# Altium PCB fullflex-1.1-addedsomevias.PcbDoc
Units mil, origin at the board's own origin, x right, y up, seen from the top; angles counter-clockwise.
Board outline 1000.01 x 1200 mil, 4 copper layers (metal4 (pad), metal3 (RF antennae), metal2 (power/ground), metal1 (signal)), stack 13.386 mil thick; 55 components, 23 nets, 173 pads, 174 vias.
Unrouted connection lines stored in the file: 37.
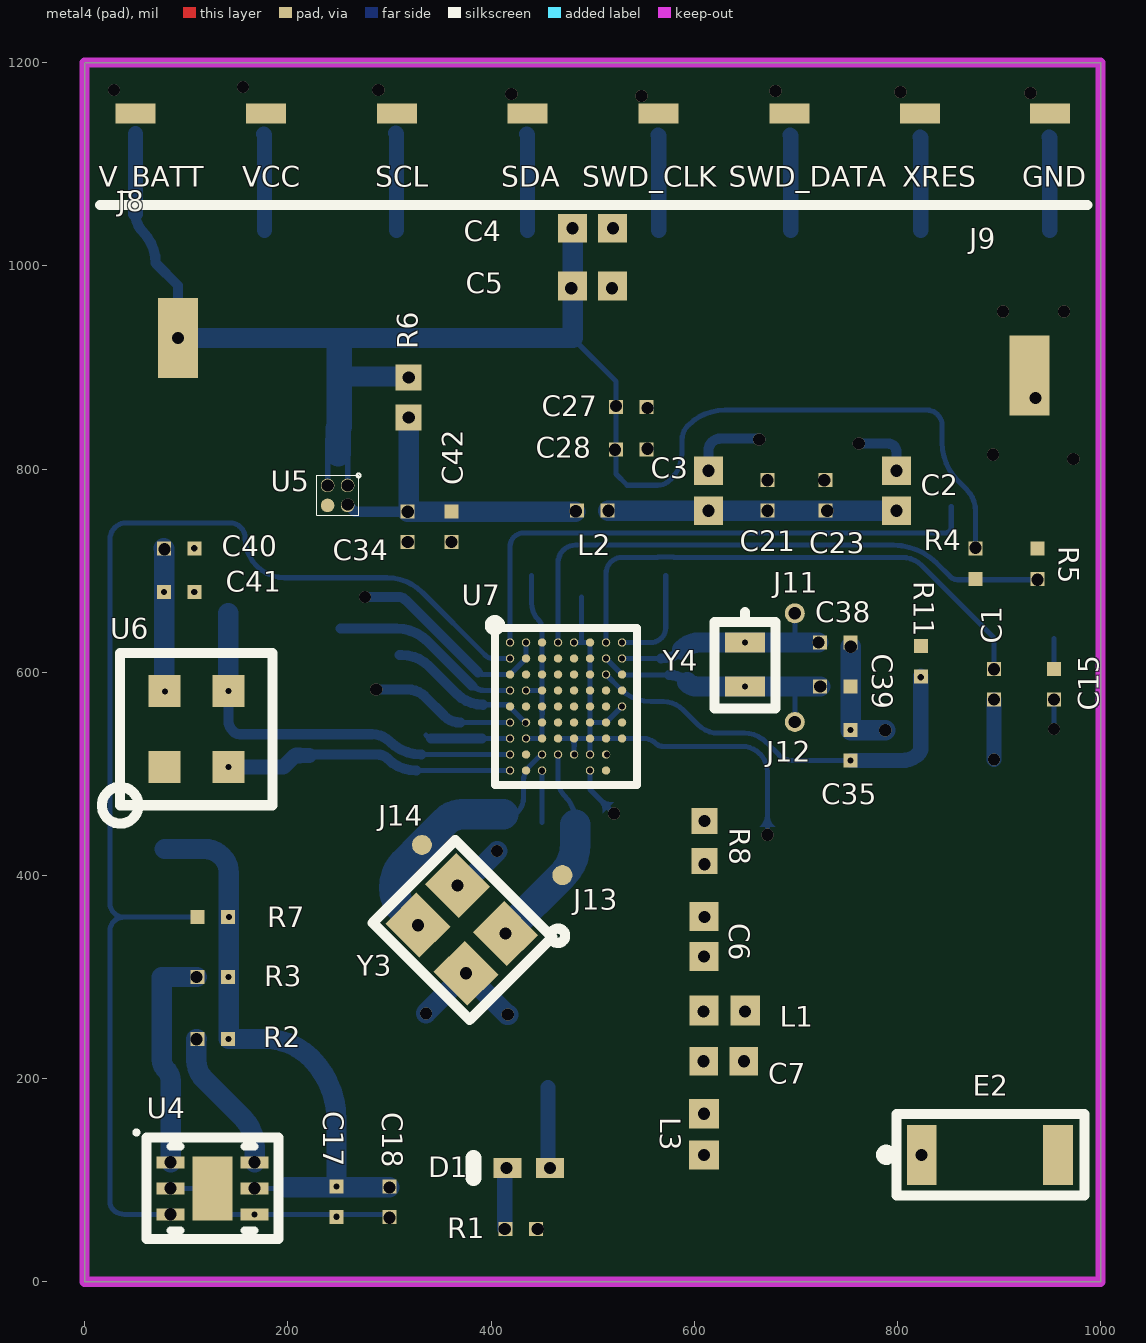
[diagram p0: metal4 (pad) view]
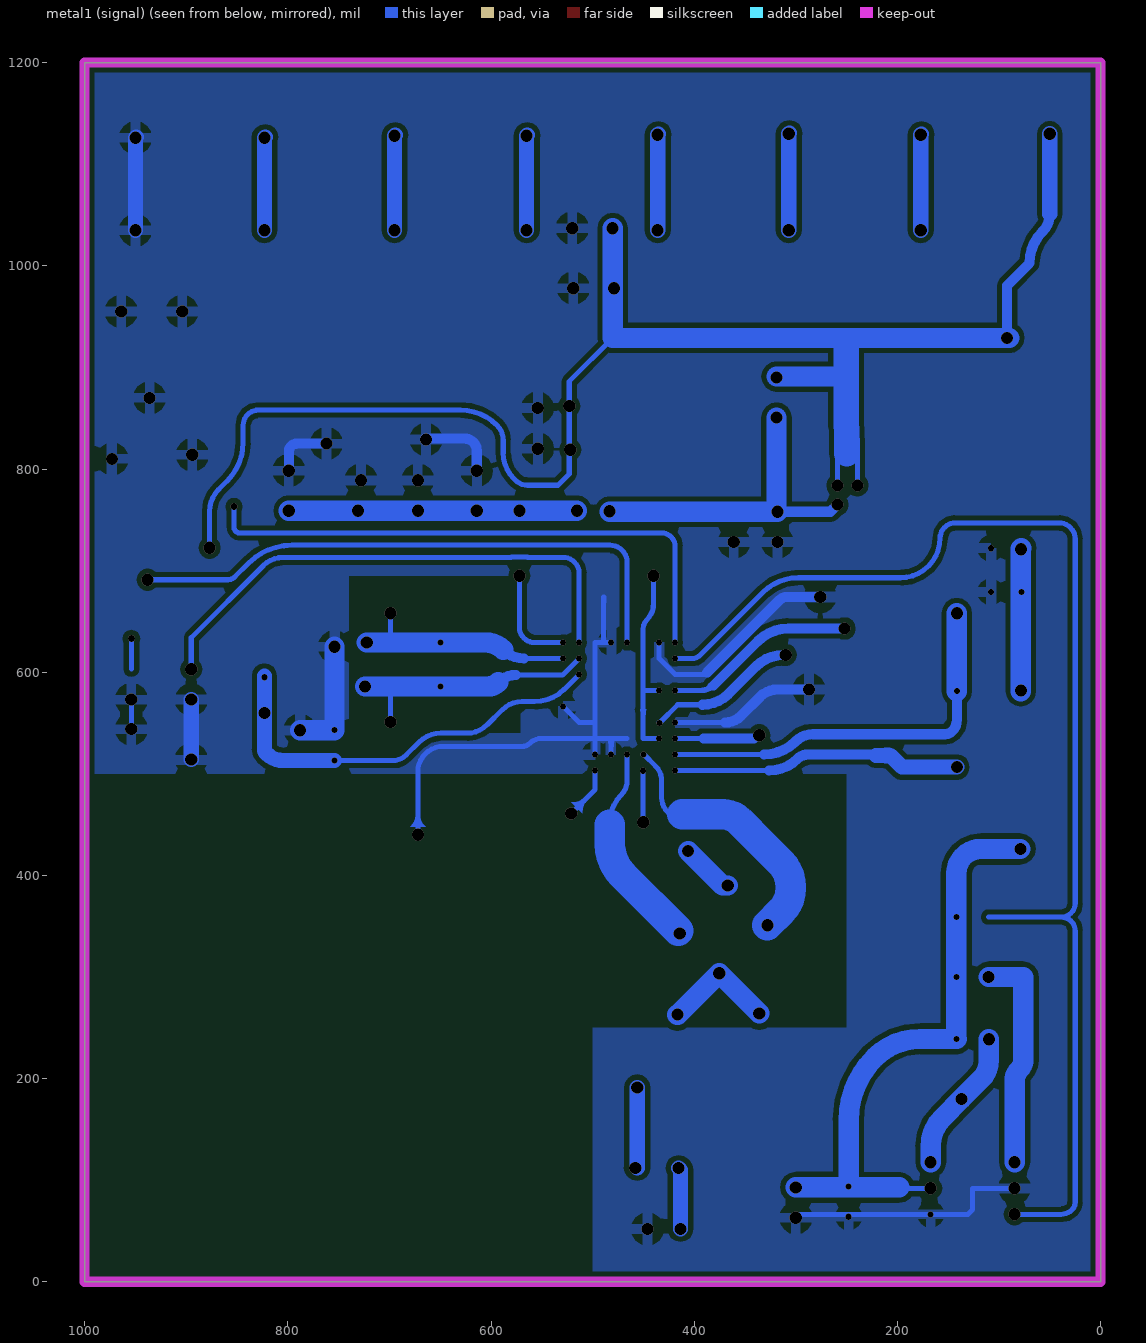
[diagram p1: metal1 (signal) view, seen from below]
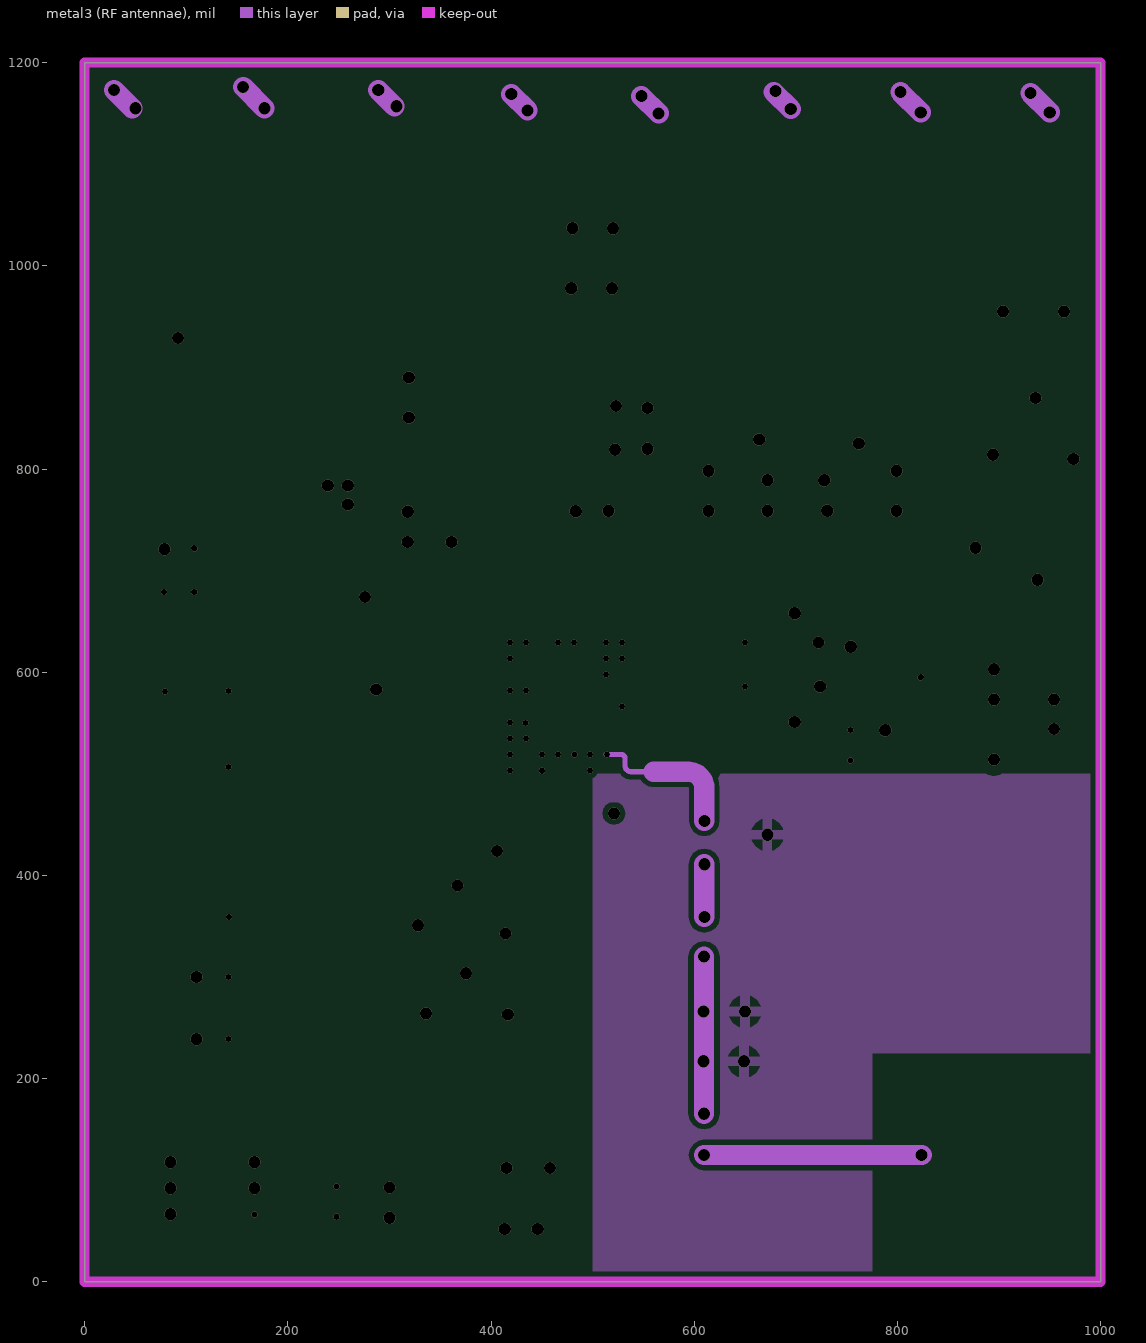
[diagram p2: metal3 (RF antennae)]
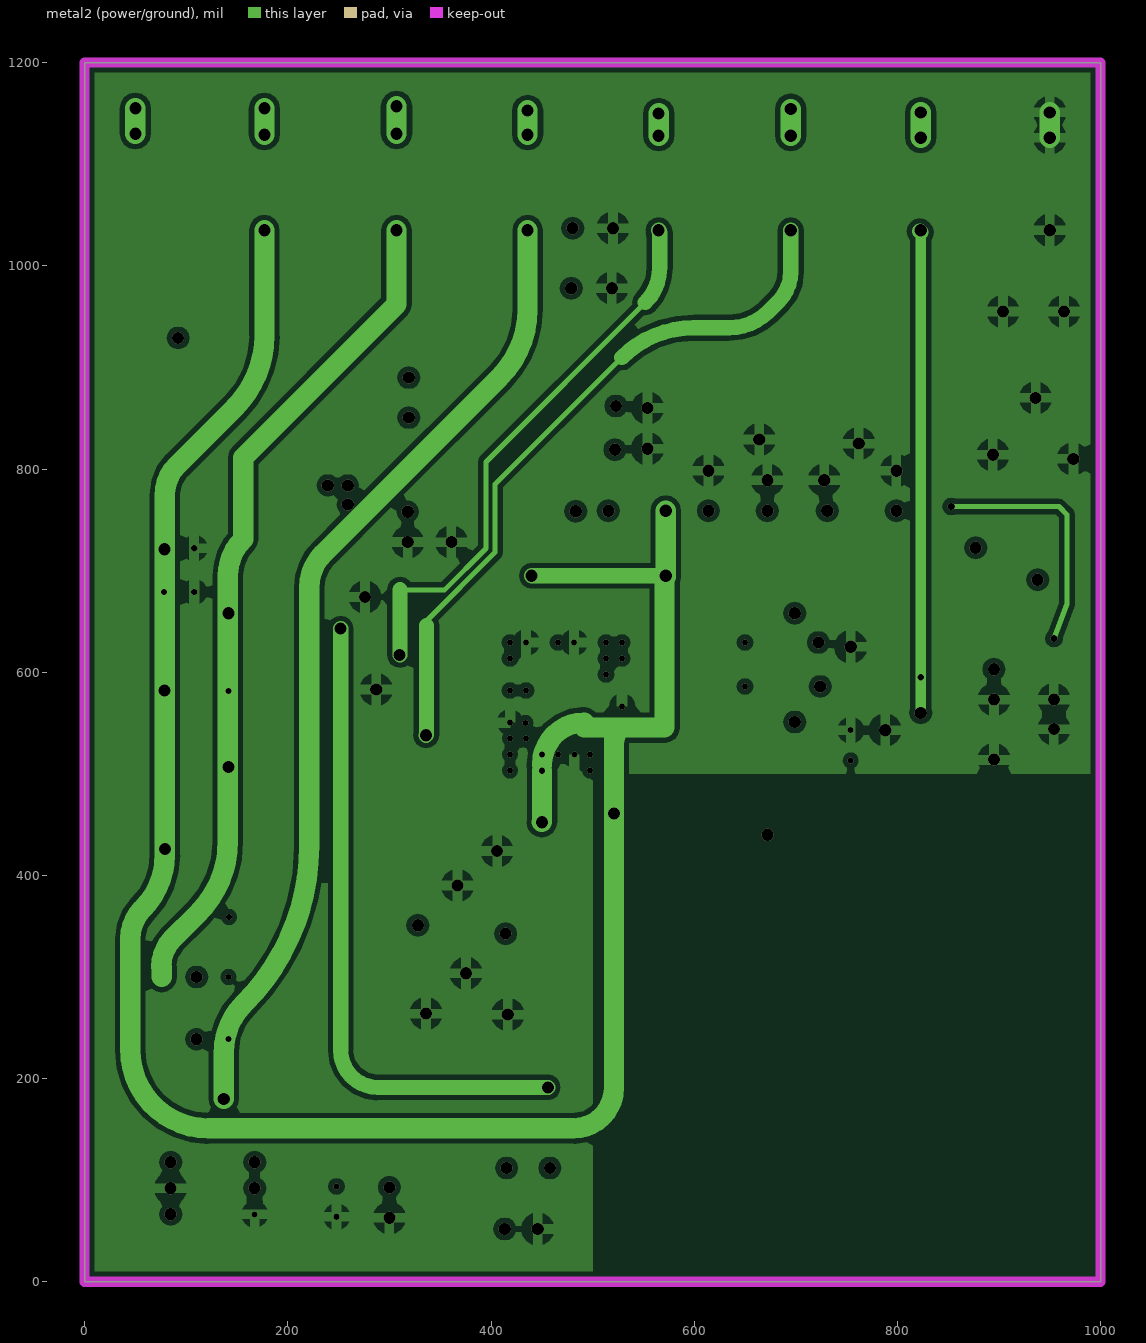
[diagram p3: metal2 (power/ground)]

## Layer stack, top to bottom
Polyimide-1: solder mask 0.4, Solder Resist, Dk 3.5
metal4 (pad): signal copper 0.04
Polyimide-2: prepreg 5, Polyimide, Dk 4.2
metal3 (RF antennae): signal copper 1.417
Polyimide-3: dielectric 0.472, Dk 3.4
metal2 (power/ground): signal copper 1.417
Polyimide-4: prepreg 5, Dk 4.2
metal1 (signal): signal copper 0.04

## Board outline
0,0 1000.01,0 999.92,1200 0,1200

## Design rules (kind name [scope] priority, off if disabled: settings)
Clearance "pour clearance" [(InNet('GND'))] p1: gap=5 ignorepadtopadclearanceinfootprint=FALSE
Clearance [All] p2: gap=4 ignorepadtopadclearanceinfootprint=TRUE
ComponentClearance [All] p1: gap=15.75 collisioncheckmode=3 verticalgap=10 showdistances=FALSE
DiffPairsRouting [All] p1: maxlimit=10 minlimit=5 mostfreqgap=10 toplayer_minwidth=5 toplayer_maxwidth=35 toplayer_prefwidth=7.5 midlayer1_minwidth=5 midlayer1_maxwidth=15 midlayer1_prefwidth=7.5 midlayer2_minwidth=5 midlayer2_maxwidth=15 midlayer2_prefwidth=7.5 bottomlayer_minwidth=5 bottomlayer_maxwidth=35 bottomlayer_prefwidth=7.5 maxuncoupledlength=500
FabricationTestPointUsage TestPointUsage [All] p1: valid=0 allowmultiple=FALSE
FabricationTestpoint Testpoint [All] p1: side=3 testpointundercomponent=TRUE minsize=40 maxsize=100 preferedsize=60 minholesize=0 maxholesize=40 preferedholesize=32 testpointgrid=1 allowsidetop=TRUE allowsidebottom=TRUE usegrid=TRUE gridtolerance=0.01
HoleToHoleClearance [All] p1: gap=1 allowstackedmicrovias=TRUE
MinimumAnnularRing [All] p1: minimumring=0
MinimumSolderMaskSliver [All] p1: minsoldermaskwidth=1
PolygonConnect [All] p1: connectstyle=Relief reliefconductorwidth=10 reliefentries=4 polygonreliefangle="90 Angle" airgapwidth=10
RoutingCorners [All] p1: cornerstyle=45-Degree minsetback=5 maxsetback=30
RoutingVias [All] p1: holewidth=12 width=22 viastyle="Through Hole" minholewidth=6 minwidth=12 maxholewidth=28 maxwidth=25 viatemplateguid#1={CE6DF762-5975-4FEC-9C67-CC1ADE7D6B15} viatemplatename#1=v15h15(1)
ShortCircuit [All] p1: allowed=TRUE
SilkToSilkClearance [All] p1: silktosilkclearance=1
SolderMaskExpansion [All] p1: expansion=-3
ViasUnderSMD [All] p1: allowed=TRUE
Width [All] p1: maxlimit=100 minlimit=5 preferedwidth=5
21 further rules are at their usual default settings.

## Classes and differential pairs
differential pair XTAL_LF: +XTAL_LF_P -XTAL_LF_N
differential pair XTAL_HF: +XTAL_HF_P -XTAL_HF_N

## Components (designator, comment, footprint, x,y, rotation, side; value= is the part's Value field where it differs from the comment)
C1 "1uF" CAP_0201(0603)_M 895.01,588 r270 top
C2 "10uF" CAP_0402(1005)_M 799,778.68 r90 top
C3 "10uF" CAP_0402(1005)_M 614,778.68 r90 top
C4 "10uF" CAP_0402(1005)_M 500,1037 r0 top
C5 "10uF" CAP_0402(1005)_M 500,980 r0 top
C6 "=Capacitance" CAP_0402(1005)_M 609.65,339.77 r270 top
C7 "=Capacitance" CAP_0402(1005)_M 629,217 r0 top
C15 "1uF" CAP_0201(0603)_M 954.01,588 r270 top
C17 "100nF" CAP_0201(0603)_M 248,79 r270 top
C18 "1uF" CAP_0201(0603)_M 300,79 r270 top
C21 "1uF" CAP_0201(0603)_M 672,773.96 r90 top
C23 "1uF" CAP_0201(0603)_M 729,773.96 r90 top
C27 "1uF" CAP_0201(0603)_M 537.96,861 r0 top
C28 "1uF" CAP_0201(0603)_M 537.96,819 r0 top
C34 "100nF" CAP_0201(0603)_M 318,743.04 r270 top
C35 "100pF" CAP_0201(0603)_M 754,528 r90 top
C38 "56pF" CAP_0201(0603)_M 739.04,629 r0 top
C39 "27pF" CAP_0201(0603)_M 739.04,586 r0 top
C40 "1uF" CAP_0201(0603)_M 93,722 r180 top
C41 "100nF" CAP_0201(0603)_M 93,679 r180 top
C42 "1uF" CAP_0201(0603)_M 361,743.04 r270 top
D1 "Red" LED_0402(1005) 438,112 r180 top
E2 "2450AT18B100" 2450AT18B100 824,125 r0 top
GND "Probe-Pin Pad" POGO-PIN-PAD 950,1150 r90 top
J8 "Battery_Connector" BATTERY_PAD 92,929 r0 top
J9 "Battery_Connector" BATTERY_PAD 930,892 r0 top
J11 "Probe-CLOCK" POGO-CLOCK-PAD 699,658 r90 top
J12 "Probe-CLOCK" POGO-CLOCK-PAD 699,551 r90 top
J13 "Probe-CLOCK" POGO-CLOCK-PAD 470.27,400.27 r90 top
J14 "Probe-CLOCK" POGO-CLOCK-PAD 332,430 r270 top
L1 "=Inductance" IND_0402(1005)_M 630,267 r180 top
L2 "Inductor Iron" RES_0201(0603)_M 499.75,759 r0 top
L3 "=Inductance" IND_0402(1005)_M 609.65,145.08 r270 top
R1 "270R" RES_0201(0603)_M 429.25,52 r0 top
R2 "4.7kR" RES_0201(0603)_M 126,239 r180 top
R3 "4.7kR" RES_0201(0603)_M 126,300 r180 top
R4 "100kR" RES_0201(0603)_M 877,706.75 r270 top
R5 "30kR" RES_0201(0603)_M 938,706.75 r90 top
R6 "=Resistance" RES_0402(1005)_M 319,870.32 r270 top
R7 "4.7kR" RES_0201(0603)_M 126.25,359 r0 top
R8 "=Resistance" RES_0402(1005)_M 610,434 r270 top
R11 "4.7kR" RES_0201(0603)_M 823,610.75 r270 top
SCL "Probe-Pin Pad" POGO-PIN-PAD 307.43,1150 r90 top
SDA "Probe-Pin Pad" POGO-PIN-PAD 436.14,1150 r90 top
SWD_CLK "Probe-Pin Pad" POGO-PIN-PAD 564.86,1150 r90 top
SWD_DATA "Probe-Pin Pad" POGO-PIN-PAD 693.57,1150 r90 top
U4 "TMP116" WSON-6 126,92 r0 top
U5 "ADP172" ADP172 249,774 r270 top
U6 "GUVB-C31SM" GUVB-C31SM 110,544 r180 top
U7 "CY8C4127FNI-BL483" WLCSP-68 473.87,566.25 r0 top
V_BATT "Probe-Pin Pad" POGO-PIN-PAD 50,1150 r90 top
VCC "Probe-Pin Pad" POGO-PIN-PAD 178.71,1150 r90 top
XRES "Probe-Pin Pad" POGO-PIN-PAD 822.29,1150 r90 top
Y3 "ECX-2236" ECX-2236 414.33,342.67 r135 top
Y4 "32.768KHz" ABS05 649.87,629.25 r270 top

## Footprints (in the part's own frame and the unit in brackets; to place one, negate y for a bottom-side part, rotate by r counter-clockwise, add the part's x,y. Pads: shape width x height; smd on the part's side, far side on the other; paste and mask are expansions set on the pad)
2450AT18B100 [mm] "2.4GHz Mini Antenna SMD, 50 ohm Resistence"
  rect 0.74x1.5 smd mask+0.03: 1(0,0) 2(3.406,0)
  silkscreen extent -1.02,-1.02 4.06,1.02, body extent -0.05,-0.9 3.35,0.9, height 1.4
ABS05 [mm] "32.768 kHz CRYSTAL 12.5 PF +/-20ppm"
  rect 0.5x1 smd mask+0.1: 1(0,0) 2(1.102,0)
  silkscreen extent -0.76,-0.76 1.65,0.76, body extent -0.25,-0.5 1.35,0.5, height 0.5
ADP172 [mm] "4-Ball WLCSP, CB-4-4"
  round 0.34 smd paste+0.01 mask+0.01: A1(-0.25,0.25) A2(0.25,0.25) B1(-0.25,-0.25) B2(0.25,-0.25)
  silkscreen extent -0.55,-0.53 0.5,0.58, body extent -0.48,-0.48 0.48,0.48, height 0.69
BATTERY_PAD [mm]
  rect 1x2 smd: 1(0,0)
CAP_0201(0603)_M [mm] "Chip Capacitor, Body 0.6x0.3mm, Height 0.33mm, IPC Low Density"
  rect 0.35x0.35 smd mask+0: 1(-0.381,0) 2(0.381,0)
  body extent -0.31,-0.17 0.32,0.16, height 0.33
CAP_0402(1005)_M [mm] "Chip Capacitor, Body 1.0x0.5mm, Height 0.6mm, IPC Low Density"
  rect 0.72x0.72 smd: 1(-0.5,0) 2(0.5,0)
  body extent -0.55,-0.3 0.55,0.3, height 0.6
ECX-2236 [mm] "48 MHz CRYSTAL 2.5X2.0mm"
  rect 1.2x1.1 smd mask+0.05: 1(0,0) 2(1.7,0) 4(0,1.4)
  rect 1.2x1.1 smd paste+0 mask+0.05: 3(1.7,1.4)
  silkscreen extent -1.14,-1.07 2.54,2.16, body extent -0.36,-0.24 2.14,1.76, height 0.8
GUVB-C31SM [mm]
  rect 0.8x0.8 smd: 1(0.8,0.95) 2(-0.8,0.95) 3(-0.8,-0.95) 4(0.8,-0.95)
  silkscreen extent -1.91,-1.91 2.36,2.36, body extent -1,-1.15 1,1.15, height 1.4
IND_0402(1005)_M [mm] "Chip Inductor, 2-Leads, Body 1.1x0.6mm, IPC Low Density"
  rect 0.73x0.74 smd: 1(-0.515,0) 2(0.515,0)
  body extent -0.55,-0.3 0.55,0.3, height 0.45
LED_0402(1005) [mm] "SMD, 2-Leads, Body 1x0.5mm"
  rect 0.7x0.5 smd: A(-0.508,0) K(0.55,0)
  silkscreen extent 1.4,-0.25 1.4,0.25, body extent -0.5,-0.25 0.5,0.25, height 0.6
POGO-CLOCK-PAD [mm]
  round 0.5 smd: 1(0,0)
POGO-PIN-PAD [mm]
  rect 0.5x1 smd: 1(0,0)
  body extent -0.16,-0.31 0.17,0.32, height 0.33
RES_0201(0603)_M [mm] "Chip Resistor, Body 0.6x0.3mm, IPC Low Density"
  rect 0.35x0.35 smd mask-0.05: 1(-0.381,0)
  rect 0.35x0.35 smd mask-0.5: 2(0.381,0)
  body extent -0.31,-0.16 0.31,0.16, height 0.3
RES_0402(1005)_M [mm] "Chip Resistor, 2-Leads, Body 1.05x0.55mm, IPC Low Density"
  rect 0.65x0.65 smd: 1(-0.5,0) 2(0.5,0)
  body extent -0.53,-0.28 0.53,0.28, height 0.4
WLCSP-68 [mm] "PSOC 4 BLE CY8C4247FNI-BL483 N40P8X9_352X391X55"
  round 0.21 smd mask+0: A1(-1.4,1.6) A2(-1,1.6) A3(-0.6,1.6) A4(-0.2,1.6) A5(0.2,1.6) A6(0.6,1.6) A7(1,1.6) A8(1.4,1.6) B1(-1.4,1.2) B2(-1,1.2) B3(-0.6,1.2) B4(-0.2,1.2) B5(0.2,1.2) B6(0.6,1.2) B7(1,1.2) B8(1.4,1.2) C1(-1.4,0.8) C2(-1,0.8) C3(-0.6,0.8) C5(0.2,0.8) C6(0.6,0.8) C7(1,0.8) C8(1.4,0.8) D1(-1.4,0.4) D2(-1,0.4) D3(-0.6,0.4) D4(-0.2,0.4) D5(0.2,0.4) D6(0.6,0.4) D7(1,0.4) D8(1.4,0.4) E1(-1.4,0) E2(-1,0) E3(-0.6,0) E4(-0.2,0) E5(0.2,0) E6(0.6,0) E7(1,0) E8(1.4,0) F1(-1.4,-0.4) F2(-1,-0.4) F3(-0.6,-0.4) F4(-0.2,-0.4) F5(0.2,-0.4) F6(0.6,-0.4) F7(1,-0.4) F8(1.4,-0.4) G1(-1.4,-0.8) G2(-1,-0.8) G3(-0.6,-0.8) G4(-0.2,-0.8) G5(0.2,-0.8) G6(0.6,-0.8) G7(1,-0.8) G8(1.4,-0.8) H1(-1.4,-1.2) H2(-1,-1.2) H3(-0.6,-1.2) H4(-0.2,-1.2) H5(0.2,-1.2) H6(0.6,-1.2) H7(1,-1.2) J1(-1.4,-1.6) J2(-1,-1.6) J3(-0.6,-1.6) J6(0.6,-1.6) J7(1,-1.6)
  round 0.21 smd mask-0.05: C4(-0.2,0.8)
  silkscreen extent -1.9,-1.97 1.77,2.16, body extent -1.77,-1.97 1.77,1.97, height 0.55
WSON-6 [mm] "SON, 6-Leads, Body 2x2mm, Pitch 0.65mm, Thermal Pad 1X1.6mm"
  rect 0.7x0.3 smd: 1(-1.05,0.65) 2(-1.05,0) 3(-1.05,-0.65) 4(1.05,-0.65) 5(1.05,0) 6(1.05,0.65)
  rect 1x1.6 smd: 7(0,0)
  silkscreen extent -1.95,-1.27 1.65,1.45, body extent -1,-1 1,1, height 0.8

## Part data
C1 C15 C18 C21 C23 C27 C28 C40 C42: library part C-0201(0603), "___ OHM ___ mW 0201(0603) SMD", Case/Package=0201, Case Code (Metric)=0603, Dielectric=X6S, Manufacturer=Murata, Manufacturer Part Number=GRM033C81A105ME05D, Max Operating Temperature=105°C, Min Operating Temperature=-55°C, Supplier Part Number 1=490-13219-1-ND, Tolerance=20%, Voltage Rating=10V, Capacitance=1uF, Case Code (Imperial)=0201, ComponentLink1Description=http://search.murata.co.jp/Ceramy/image/img/A01X/partnumbering_e_01.pdf, ComponentLink1URL=http://search.murata.co.jp/Ceramy/image/img/A01X/partnumbering_e_01.pdf, Description 1="1µF 10V Ceramic Capacitor X6S 0201 (0603 Metric) 0.024\" L x 0.012\" W (0.60mm x 0.30mm)", Length=0.024inch, Mount="Surface Mount", Packaging="Tape and Reel", Pricing 1="1=0.48, 10=0.333, 100=0.1997, 500=0.1498, 1000=0.1265, 2500=0.1198, 5000=0.1132 (USD)", Stock 1=1199738, Supplier 1=Digi-Key, Thickness=0.015inch, Voltage Rating (DC)=10V, Width=0.012inch
C2 C3 C4 C5: library part C-0402(1005), "___ OHM ___ mW 0402(1005) SMD", Case/Package=0402, Case Code (Metric)=1005, Dielectric=X5R, Manufacturer=Murata, Manufacturer Part Number=GRM155R60J106ME15D, Max Operating Temperature=85°C, Min Operating Temperature=-55°C, Supplier Part Number 1=490-13238-1-ND, Tolerance=20%, Voltage Rating=6.3V, Capacitance=10uF, Case Code (Imperial)=0402, ComponentLink1Description=http://search.murata.co.jp/Ceramy/image/img/A01X/partnumbering_e_01.pdf, ComponentLink1URL=http://search.murata.co.jp/Ceramy/image/img/A01X/partnumbering_e_01.pdf, Description 1="10µF 6.3V Ceramic Capacitor X5R 0402 (1005 Metric) 0.039\" L x 0.020\" W (1.00mm x 0.50mm)", Length=0.039inch, Mount="Surface Mount", Packaging="Tape and Reel", Pricing 1="1=0.29, 10=0.196, 100=0.0994, 500=0.068, 1000=0.0602, 2500=0.0576, 5000=0.0523 (USD)", Stock 1=427251, Supplier 1=Digi-Key, Thickness=0.026inch, Voltage Rating (DC)=6.3V, Width=0.02inch
C6 C7: library part C-0402(1005), "___ OHM ___ mW 0402(1005) SMD"
C17 C34 C41: library part C-0201(0603), "___ OHM ___ mW 0201(0603) SMD", Case/Package=0201, Case Code (Metric)=0603, Dielectric=X5R, Manufacturer=Murata, Manufacturer Part Number=GRM033R61A104ME15D, Max Operating Temperature=85°C, Min Operating Temperature=-55°C, Package Quantity=10, Supplier Part Number 1=490-5405-1-ND, Tolerance=20%, Voltage Rating=10V, Capacitance=100nF, Case Code (Imperial)=0201, ComponentLink1Description=https://datasheet.ciiva.com/131/partnumbering-e-01-131478.pdf, ComponentLink1URL=https://datasheet.ciiva.com/131/partnumbering-e-01-131478.pdf, ComponentLink2Description=https://datasheet.ciiva.com/131/partnumbering-e-01-131479.pdf, ComponentLink2URL=https://datasheet.ciiva.com/131/partnumbering-e-01-131479.pdf, Depth=0.3mm, Description 1="Cap Ceramic 0.1uF 10V X5R 20% SMD 0201 85C Paper T/R", Lead Free="Lead Free", Length=0.024inch, Mount="Surface Mount", Packaging="Tape and Reel", Pricing 1="1=0.1, 10=0.021, 100=0.0092, 500=0.0066, 1000=0.0052, 2500=0.0047, 5000=0.0043 (USD)", Stock 1=5696, Supplier 1=Digi-Key, Thickness=0.013inch, Voltage Rating (DC)=10V, Width=0.012inch
C35: library part C-0201(0603), "___ OHM ___ mW 0201(0603) SMD", Case/Package=0201, Case Code (Metric)=0603, Dielectric=X7R, Manufacturer=Murata, Manufacturer Part Number=GRM033R71C101KA01D, Max Operating Temperature=125°C, Min Operating Temperature=-55°C, Package Quantity=15000, Supplier Part Number 1=490-6146-1-ND, Tolerance=10%, Voltage Rating=16V, Capacitance=100pF, Case Code (Imperial)=0201, ComponentLink1Description=https://datasheet.ciiva.com/11605/product-11605537.pdf, ComponentLink1URL=https://datasheet.ciiva.com/11605/product-11605537.pdf, ComponentLink2Description=https://datasheet.ciiva.com/6263/partnumbering-e-01-6263654.pdf, ComponentLink2URL=https://datasheet.ciiva.com/6263/partnumbering-e-01-6263654.pdf, ComponentLink3Description=https://datasheet.ciiva.com/6263/partnumbering-e-01-6263658.pdf, ComponentLink3URL=https://datasheet.ciiva.com/6263/partnumbering-e-01-6263658.pdf, ComponentLink4Description=https://datasheet.ciiva.com/18184/getdatasheetpartid-254442-18184076.pdf, ComponentLink4URL=https://datasheet.ciiva.com/18184/getdatasheetpartid-254442-18184076.pdf, Depth=0.3mm, Description 1="Multilayer Ceramic Capacitors MLCC - SMD/SMT 100pF 16 volts 10%", Height=0.3mm, Lead Free="Lead Free", Length=0.6mm, Mount="Surface Mount", Packaging="Tape and Reel", Pricing 1="1=0.1, 10=0.033, 100=0.0148, 500=0.0106, 1000=0.0083, 2500=0.0076, 5000=0.007 (USD)", Radiation Hardening=No, Stock 1=195000, Supplier 1=Digi-Key, Termination=SMD/SMT, Thickness=0.013inch, Voltage Rating (DC)=16V, Width=0.012inch
C38: library part C-0201(0603), "___ OHM ___ mW 0201(0603) SMD", Case/Package=0201, Case Code (Metric)=0603, Dielectric=C0G, Manufacturer=Murata, Manufacturer Part Number=GRM0335C1E560JA01D, Max Operating Temperature=125°C, Min Operating Temperature=-55°C, Package Quantity=15000, Supplier Part Number 1=490-3155-1-ND, Tolerance=5%, Voltage Rating=25V, Capacitance=56pF, Case Code (Imperial)=0201, ComponentLink1Description=https://datasheet.ciiva.com/14891/product-14891125.pdf, ComponentLink1URL=https://datasheet.ciiva.com/14891/product-14891125.pdf, ComponentLink2Description=https://datasheet.ciiva.com/29542/product-29542517.pdf, ComponentLink2URL=https://datasheet.ciiva.com/29542/product-29542517.pdf, ComponentLink3Description=https://datasheet.ciiva.com/29542/product-29542518.pdf, ComponentLink3URL=https://datasheet.ciiva.com/29542/product-29542518.pdf, Depth=0.3mm, Description 1="Multilayer Ceramic Capacitors MLCC - SMD/SMT 0201 56pF 25volts C0G +/-5%", Height=0.3mm, Lead Free="Lead Free", Length=0.6mm, Mount="Surface Mount", Packaging="Tape and Reel", Pricing 1="1=0.1, 10=0.014, 100=0.0064, 500=0.0046, 1000=0.0036, 2500=0.0033, 5000=0.003 (USD)", Stock 1=123138, Supplier 1=Digi-Key, Termination=SMD/SMT, Thickness=0.013inch, Voltage Rating (DC)=25V, Width=0.012inch
C39: library part C-0201(0603), "___ OHM ___ mW 0201(0603) SMD", Case/Package=0201, Case Code (Metric)=0603, Dielectric=C0G, Manufacturer=Murata, Manufacturer Part Number=GJM0335C0J270JB01D, Max Operating Temperature=125°C, Min Operating Temperature=-55°C, Package Quantity=1, Supplier Part Number 1=490-8067-1-ND, Tolerance=5%, Voltage Rating=6.3V, Capacitance=27pF, Case Code (Imperial)=0201, ComponentLink1Description=https://datasheet.ciiva.com/26947/getdatasheetpartid-785432-26947666.pdf, ComponentLink1URL=https://datasheet.ciiva.com/26947/getdatasheetpartid-785432-26947666.pdf, ComponentLink2Description=https://datasheet.ciiva.com/29534/partnumbering-e-01-29534181.pdf, ComponentLink2URL=https://datasheet.ciiva.com/29534/partnumbering-e-01-29534181.pdf, ComponentLink3Description=https://datasheet.ciiva.com/29534/partnumbering-e-01-29534182.pdf, ComponentLink3URL=https://datasheet.ciiva.com/29534/partnumbering-e-01-29534182.pdf, ComponentLink4Description=https://datasheet.ciiva.com/29534/partnumbering-e-01-29534183.pdf, ComponentLink4URL=https://datasheet.ciiva.com/29534/partnumbering-e-01-29534183.pdf, ComponentLink5Description=https://datasheet.ciiva.com/11606/product-11606904.pdf, ComponentLink5URL=https://datasheet.ciiva.com/11606/product-11606904.pdf, ComponentLink6Description=https://datasheet.ciiva.com/16497/l0005e-16497225.pdf, ComponentLink6URL=https://datasheet.ciiva.com/16497/l0005e-16497225.pdf, Depth=0.3mm, Description 1="Multilayer Ceramic Capacitors MLCC - SMD/SMT 0201 27pF 6.3Volts C0G 5%", Height=0.3mm, Lead Free="Lead Free", Length=0.6mm, Mount="Surface Mount", Packaging="Tape and Reel", Pricing 1="1=0.1, 10=0.058, 100=0.026, 500=0.0186, 1000=0.0146, 2500=0.0133, 5000=0.0122 (USD)", Radiation Hardening=No, Stock 1=27616, Supplier 1=Digi-Key, Termination=SMD/SMT, Thickness=0.013inch, Voltage Rating (DC)=6.3V, Width=0.012inch
D1: library part LED_0402(1005), "LED, 0402(1005) SMD", Case/Package=0402, Case Code (Metric)=1005, Forward Current=20mA, Forward Voltage=1.95V, Lens Colour=Clear, Manufacturer=Kingbright, Manufacturer Part Number=APHHS1005SURCK, Max Operating Temperature=85°C, Min Operating Temperature=-40°C, Package Quantity=2000, Supplier Part Number 1=754-1104-1-ND, Case Code (Imperial)=0402, Colour=Red, ComponentLink1Description=https://datasheet.ciiva.com/14603/70062833-14603899.pdf, ComponentLink1URL=https://datasheet.ciiva.com/14603/70062833-14603899.pdf, ComponentLink2Description=https://datasheet.ciiva.com/2114/aphhs1005surck-2114140.pdf, ComponentLink2URL=https://datasheet.ciiva.com/2114/aphhs1005surck-2114140.pdf, ComponentLink3Description=https://datasheet.ciiva.com/4689/aphhs1005surck-32322-4689068.pdf, ComponentLink3URL=https://datasheet.ciiva.com/4689/aphhs1005surck-32322-4689068.pdf, ComponentLink4Description=https://datasheet.ciiva.com/2114/aphhs1005surck-2114141.pdf, ComponentLink4URL=https://datasheet.ciiva.com/2114/aphhs1005surck-2114141.pdf, ComponentLink5Description=https://datasheet.ciiva.com/2114/aphhs1005surck-2114142.pdf, ComponentLink5URL=https://datasheet.ciiva.com/2114/aphhs1005surck-2114142.pdf, Description 1="LED 1X0.5MM 630NM RD WTR CLR SMD", Dominant Wavelength=630nm, Height=0.6mm, Illumination Colour=Red, Lead Free="Lead Free", Length=1mm, Lens Style=Flat,Clear, Luminous Intensity=220mcd, Mount="Surface Mount", Number of LEDs=1, Number of Pins=2, Packaging="Tape and Reel", Pricing 1="1=0.44, 10=0.318, 25=0.2596, 100=0.2077, 250=0.1752, 500=0.1493, 1000=0.1168 (USD)", Stock 1=195639, Supplier 1=Digi-Key, Test Current=20mA, Viewing Angle=120°, Wavelength=635nm, Width=0.5mm
E2: "2.4 GHz BLE Antenna", Case/Package=CSMD, Frequency=2.45GHz, Manufacturer=Johanson, Manufacturer Part Number=2450AT18B100E, Max Frequency=2.5GHz, Max Power Dissipation=3W, Package Quantity=1, Supplier Part Number 1=712-1006-1-ND, Bandwidth=100MHz, ComponentLink1Description=https://datasheet.ciiva.com/1124/1318299-1124918.pdf, ComponentLink1URL=https://datasheet.ciiva.com/1124/1318299-1124918.pdf, ComponentLink2Description=https://datasheet.ciiva.com/24025/antenna-2450at18b100-242422-24025839.pdf, ComponentLink2URL=https://datasheet.ciiva.com/24025/antenna-2450at18b100-242422-24025839.pdf, Contact Plating=Tin, Description 1="JOHANSON TECHNOLOGY         2450AT18B100E             ANTENNA, CERAMIC, 2.45GHZ", Gain=-0.5dB, Height=0.051inch, Impedance=50R, Length=3.2mm, Mount="Surface Mount", Number of Bands=1, Packaging="Tape and Reel", Power Rating=3W, Pricing 1="1=0.62, 10=0.541, 25=0.4788, 100=0.4172, 250=0.3631, 500=0.309, 1000=0.2472 (USD)", REACH SVHC="No SVHC", Return Loss=-9.5dB, Stock 1=187598, Supplier 1=Digi-Key, Termination=Solder, Width=1.6mm
L1 L3: library part I-0402(1005)
L2: "Magnetic-Core Inductor"
R1: library part R-0201(0603), "___ OHM ___ mW 0201(0603) SMD", Case/Package=0201, Manufacturer=Yageo, Manufacturer Part Number=RC0201JR-07270RL, Max Operating Temperature=125°C, Min Operating Temperature=-55°C, Power Rating=50mW, Supplier Part Number 1=311-270NCT-ND, Temperature Coefficient=200ppm/°C, Tolerance=5%, ComponentLink1Description=https://datasheet.ciiva.com/16855/pyu-rc0201-51-rohs-l-8-16855339.pdf, ComponentLink1URL=https://datasheet.ciiva.com/16855/pyu-rc0201-51-rohs-l-8-16855339.pdf, ComponentLink2Description=https://datasheet.ciiva.com/28392/pyu-rc0201-51-rohs-l-8-28392445.pdf, ComponentLink2URL=https://datasheet.ciiva.com/28392/pyu-rc0201-51-rohs-l-8-28392445.pdf, Composition="Thick Film", Contact Plating=Tin,Matte, Depth=0.3mm, Description 1="Res Thick Film 0201 270 Ohm 5% 0.05W(1/20W) ±200ppm/C Molded SMD Paper T/R", Lead Free="Lead Free", Length=0.6mm, Military Standard=Not, Packaging="Tape and Reel", Pricing 1="1=0.1, 10=0.043, 100=0.0174, 1000=0.0078, 2500=0.0068, 5000=0.0056 (USD)", Radiation Hardening=No, Resistance=270R, Stock 1=26098, Supplier 1=Digi-Key
R2 R3 R7 R11: library part R-0201(0603), "___ OHM ___ mW 0201(0603) SMD", Case/Package=0201, Case Code (Metric)=0603, Manufacturer=Samsung, Manufacturer Part Number=RC0603F472CS, Max Operating Temperature=125°C, Max Power Dissipation=50mW, Min Operating Temperature=-55°C, Package Quantity=1, Supplier Part Number 1=1276-3651-1-ND, Temperature Coefficient=250ppm/°C, Tolerance=1%, Voltage Rating (DC)=25V, Case Code (Imperial)=0201, ComponentLink1Description=http://components.arrow.com/part/dataview/52317213S9968065N4139, ComponentLink1URL=http://components.arrow.com/part/dataview/52317213S9968065N4139, ComponentLink2Description=http://www.samsungsem.com/kr/support/library/product-catalog/__icsFiles/afieldfile/2015/09/22/CHIP_RESISTOR_2015.pdf, ComponentLink2URL=http://www.samsungsem.com/kr/support/library/product-catalog/__icsFiles/afieldfile/2015/09/22/CHIP_RESISTOR_2015.pdf, ComponentLink3Description=http://www.samsungsem.com/servlet/FileDownload?type=spec&file=RC0603F100CS.pdf, ComponentLink3URL=http://www.samsungsem.com/servlet/FileDownload?type=spec&file=RC0603F100CS.pdf, Composition="Thick Film", Contact Plating=Tin, Description 1="RES SMD 4.7K OHM 1% 1/20W 0201", Height=0.01inch, Lead Free="Lead Free", Length=0.024inch, Number of Terminations=2, Packaging="Tape and Reel", Pricing 1="1=0.1, 10=0.021, 100=0.0086, 1000=0.0039, 2500=0.0033, 5000=0.0028 (USD)", Radiation Hardening=No, Resistance=4.7kR, Stock 1=51051, Supplier 1=Digi-Key, Width=0.012inch
R4: library part R-0201(0603), "___ OHM ___ mW 0201(0603) SMD", Case/Package=0201, Case Code (Metric)=0603, Manufacturer=Yageo, Manufacturer Part Number=RC0201FR-07100KL, Max Operating Temperature=125°C, Max Power Dissipation=50mW, Min Operating Temperature=-55°C, Package Quantity=10000, Supplier Part Number 1=311-100KMDKR-ND, Temperature Coefficient=200ppm/°C, Tolerance=1%, Voltage Rating=25V, Case Code (Imperial)=0201, ComponentLink1Description=https://datasheet.ciiva.com/7660/1421516-7660806.pdf, ComponentLink1URL=https://datasheet.ciiva.com/7660/1421516-7660806.pdf, ComponentLink2Description=https://datasheet.ciiva.com/2493/pyu-r-int-thick-7-2493769.pdf, ComponentLink2URL=https://datasheet.ciiva.com/2493/pyu-r-int-thick-7-2493769.pdf, ComponentLink3Description=https://datasheet.ciiva.com/2493/pyu-r-int-thick-7-2493770.pdf, ComponentLink3URL=https://datasheet.ciiva.com/2493/pyu-r-int-thick-7-2493770.pdf, ComponentLink4Description=https://datasheet.ciiva.com/26829/getdatasheetpartid-420441-26829850.pdf, ComponentLink4URL=https://datasheet.ciiva.com/26829/getdatasheetpartid-420441-26829850.pdf, ComponentLink5Description=https://datasheet.ciiva.com/46391/1421516-46391338.pdf, ComponentLink5URL=https://datasheet.ciiva.com/46391/1421516-46391338.pdf, ComponentLink6Description=https://datasheet.ciiva.com/2493/pyu-r-int-thick-7-2493771.pdf, ComponentLink6URL=https://datasheet.ciiva.com/2493/pyu-r-int-thick-7-2493771.pdf, ComponentLink7Description=https://datasheet.ciiva.com/16855/pyu-rc0201-51-rohs-l-8-16855774.pdf, ComponentLink7URL=https://datasheet.ciiva.com/16855/pyu-rc0201-51-rohs-l-8-16855774.pdf, ComponentLink8Description=https://datasheet.ciiva.com/22698/1563626-22698495.pdf, ComponentLink8URL=https://datasheet.ciiva.com/22698/1563626-22698495.pdf, Composition="Thick Film", Contact Plating=Tin,Matte, Depth=0.3mm, Description 1="RES SMD 100K OHM 1% 1/20W 0201", Height=0.01inch, Lead Free="Lead Free", Length=0.024inch, Military Standard=Not, Number of Pins=2, Number of Terminations=2, Packaging="Tape and Reel", Power Rating=50mW, Pricing 1="1=0.1, 10=0.057, 100=0.0232, 1000=0.0104, 2500=0.009, 5000=0.0075 (USD)", REACH SVHC="No SVHC", Resistance=100kR, Stock 1=5575803, Supplier 1=Digi-Key, Termination=SMD/SMT, Voltage Rating (DC)=25V, Width=0.012inch
R5: library part R-0201(0603), "___ OHM ___ mW 0201(0603) SMD", Case/Package=0201, Case Code (Metric)=0603, Manufacturer=Yageo, Manufacturer Part Number=RC0201FR-0730KL, Max Operating Temperature=125°C, Max Power Dissipation=50mW, Min Operating Temperature=-55°C, Package Quantity=10000, Supplier Part Number 1=YAG2281CT-ND, Temperature Coefficient=200ppm/°C, Tolerance=1%, Voltage Rating=25V, Case Code (Imperial)=0201, ComponentLink1Description=http://components.arrow.com/part/dataview/0323_03297116, ComponentLink1URL=http://components.arrow.com/part/dataview/0323_03297116, ComponentLink2Description=http://www.yageo.com.tw/exep/pages/download/literatures/PYu-R_INT-thick_7.pdf, ComponentLink2URL=http://www.yageo.com.tw/exep/pages/download/literatures/PYu-R_INT-thick_7.pdf, ComponentLink3Description=http://www.yageo.com/documents/recent/PYu-RC_Group_51_RoHS_L_8.pdf, ComponentLink3URL=http://www.yageo.com/documents/recent/PYu-RC_Group_51_RoHS_L_8.pdf, ComponentLink4Description=http://www.mouser.com/ds/2/447/RC0201-559633.pdf, ComponentLink4URL=http://www.mouser.com/ds/2/447/RC0201-559633.pdf, Composition="Thick Film", Depth=0.3mm, Description 1="Thick Film Resistors - SMD 30K OHM 1%", Height=0.01inch, Lead Free="Lead Free", Length=0.6mm, Military Standard=Not, Number of Terminations=2, Packaging="Tape and Reel", Power Rating=50mW, Pricing 1="1=0.1, 10=0.046, 100=0.0187, 1000=0.0084, 2500=0.0073, 5000=0.006 (USD)", Resistance=30kR, Stock 1=45325, Supplier 1=Digi-Key, Termination=SMD/SMT, Width=0.012inch
R6 R8: library part R-0402(1005), "___ OHM ___ mW 0402(1005) SMD"
U4: "TI Digital I2C Temperature Sensor", Manufacturer="Texas Instruments", Manufacturer Part Number=TMP116AIDRVT, Max Operating Temperature=150°C, Min Operating Temperature=-55°C, Supplier Part Number 1=296-46944-1-ND, Interface=I2C,SMBus,2-Wire, Pricing 1="1=4.01, 10=3.599, 100=2.9485 (USD)", Stock 1=995, Supplier 1=Digi-Key
U5: "3V LDO", Dropout Voltage=50mV, Manufacturer="Analog Devices", Manufacturer Part Number=ADP172ACBZ-3.0-R7, Max Input Voltage=3.6V, Max Operating Temperature=125°C, Max Output Current=300mA, Max Output Voltage=3V, Max Supply Current=170uA, Min Current Limit=400mA, Min Input Voltage=1.6V, Min Operating Temperature=-40°C, Min Output Voltage=800mV, Nominal Supply Current=23uA, Package Quantity=3000, Power Supply Rejection Ratio (PSRR)=73dB, Quiescent Current=60uA, Supplier Part Number 1=ADP172ACBZ-3.0-R7CT-ND, ComponentLink1Description=https://datasheet.ciiva.com/2056/adp172-2056690.pdf, ComponentLink1URL=https://datasheet.ciiva.com/2056/adp172-2056690.pdf, ComponentLink2Description=https://datasheet.ciiva.com/2056/adp172-2056691.pdf, ComponentLink2URL=https://datasheet.ciiva.com/2056/adp172-2056691.pdf, ComponentLink3Description=https://datasheet.ciiva.com/2056/adp172-2056692.pdf, ComponentLink3URL=https://datasheet.ciiva.com/2056/adp172-2056692.pdf, ComponentLink4Description=https://datasheet.ciiva.com/3224/adp172-3224693.pdf, ComponentLink4URL=https://datasheet.ciiva.com/3224/adp172-3224693.pdf, ComponentLink5Description=https://datasheet.ciiva.com/17365/adp172-17365245.pdf, ComponentLink5URL=https://datasheet.ciiva.com/17365/adp172-17365245.pdf, ComponentLink6Description=https://datasheet.ciiva.com/48694/001251525-da-01-en-ic-reg-ldo-adp172acbz-3-0-r7-wlcsp-4-adi-48694412.pdf, ComponentLink6URL=https://datasheet.ciiva.com/48694/001251525-da-01-en-ic-reg-ldo-adp172acbz-3-0-r7-wlcsp-4-adi-48694412.pdf, Contact Plating=Copper,Tin,Silver, Description 1="Linear Voltage Regulator IC Positive Fixed 1 Output 3V 300mA 4-WLCSP (0.95x1.03)", Lead Free="Contains Lead", Mount="Surface Mount", Number of Outputs=1, Number of Pins=4, Number of Regulators=1, Operating Supply Current=23uA, Output Current=300mA, Output Voltage=3V, Packaging="Tape and Reel", Polarity=Positive, Pricing 1="1=1.13, 10=1.013, 100=0.7896, 500=0.6523, 1000=0.515 (USD)", Radiation Hardening=No, Stock 1=438, Supplier 1=Digi-Key
U7: "PSOC 4 CYBLE", Frequency=48MHz, Manufacturer=Cypress, Manufacturer Part Number=CY8C4247FNI-BL483T, Max Operating Temperature=85°C, Max Supply Voltage=5.5V, Min Operating Temperature=-40°C, Min Supply Voltage=1.71V, Package Quantity=2000, Supplier Part Number 1=428-4490-ND, ComponentLink1Description=http://www.cypress.com/?docID=50617, ComponentLink1URL=http://www.cypress.com/?docID=50617, ComponentLink2Description=http://www.cypress.com/file/137466/download, ComponentLink2URL=http://www.cypress.com/file/137466/download, Contact Plating=Copper,Tin,Silver, Core Architecture=ARM, Data Bus Width=32b, Interface=I2C,SPI,I2S,IrDA,SSP,UART,USART,LIN, Lead Free="Lead Free", Max Frequency=48MHz, Memory Size=128KB, Memory Type=FLASH, Mount="Surface Mount", Number of I/Os=36, Number of Programmable I/O=36, Number of Timers/Counters=4, Oscillator Type=Internal, Packaging="Tape and Reel", Peripherals="Brown-out Detect/Reset,POR,PWM,WDT,LVD,LCD", Pricing 1="1=7.05, 10=6.345, 25=5.7812, 100=5.217, 250=4.794, 500=4.371, 1000=3.807, 2500=3.666 (USD)", RAM Size=16KB, Stock 1=250, Supplier 1=Digi-Key, Watchdog Timer=Yes
Y3: "24 MHz Crystal", Case/Package=SMD/SMT, ESR (Equivalent Series Resistance)=60R, Frequency=24MHz, Frequency Stability=10ppm, Load Capacitance=8pF, Manufacturer="ECS International", Manufacturer Part Number=ECS-240-8-36CKM-TR, Max Operating Temperature=70°C, Min Operating Temperature=-20°C, Package Quantity=1000, Supplier Part Number 1=XC1557CT-ND, ComponentLink1Description=http://www.ecsxtal.com/store/pdf/partnumber4.pdf, ComponentLink1URL=http://www.ecsxtal.com/store/pdf/partnumber4.pdf, ComponentLink2Description=http://www.mouser.com/ds/2/122/ECX-2236-15751.pdf, ComponentLink2URL=http://www.mouser.com/ds/2/122/ECX-2236-15751.pdf, Description 1="Crystals 24MHz 10ppm", Frequency Tolerance=10ppm, Height=0.026inch, Length=0.098inch, Mount="Surface Mount", Packaging="Tape and Reel", Pricing 1="1=1.12, 10=0.987, 50=0.9224, 100=0.8151, 500=0.7722 (USD)", Stock 1=30313, Supplier 1=Digi-Key, Termination=SMD/SMT, Tolerance=10ppm, Width=0.079inch
Y4: library part ABS05, "Crystal Oscillator", Case/Package=SMD/SMT, ESR (Equivalent Series Resistance)=90kR, Frequency=32.768kHz, Frequency Tolerance=20ppm, Load Capacitance=12.5pF, Manufacturer=Abracon, Manufacturer Part Number=ABS05-32.768KHZ-T, Max Operating Temperature=85°C, Min Operating Temperature=-40°C, Package Quantity=3000, Supplier Part Number 1=535-11899-1-ND, ComponentLink1Description=https://datasheet.ciiva.com/23810/abs05-23810480.pdf, ComponentLink1URL=https://datasheet.ciiva.com/23810/abs05-23810480.pdf, ComponentLink2Description=https://datasheet.ciiva.com/6728/abs05-6728949.pdf, ComponentLink2URL=https://datasheet.ciiva.com/6728/abs05-6728949.pdf, ComponentLink3Description=https://datasheet.ciiva.com/6728/abs05-6728950.pdf, ComponentLink3URL=https://datasheet.ciiva.com/6728/abs05-6728950.pdf, ComponentLink4Description=https://datasheet.ciiva.com/16411/abs05-16411149.pdf, ComponentLink4URL=https://datasheet.ciiva.com/16411/abs05-16411149.pdf, Depth=1mm, Description 1="32.768kHz ±20ppm Crystal 12.5pF 90 kOhm -40°C ~ 85°C  Surface Mount 2-SMD", Height=0.02inch, Lead Free="Lead Free", Length=1.6mm, Mount="Surface Mount", Number of Pins=2, Packaging="Tape and Reel", Pricing 1="1=1.03, 10=0.911, 50=0.8514, 100=0.7524, 500=0.7128, 1000=0.594 (USD)", Radiation Hardening=No, REACH SVHC="No SVHC", Series Resistance=90kR, Stock 1=92285, Supplier 1=Digi-Key, Termination=SMD/SMT, Tolerance=20ppm, Width=0.039inch

## Via types
v1: diameter 12, hole 12, metal4 (pad) to metal1 (signal), 72 vias
v2: diameter 6, hole 6, metal4 (pad) to metal1 (signal), 42 vias
v3: diameter 12, hole 12, metal2 (power/ground) to metal1 (signal), 30 vias
v4: diameter 12, hole 12, metal4 (pad) to metal3 (RF antennae), 19 vias
v5: diameter 12, hole 12, metal3 (RF antennae) to metal2 (power/ground), 8 vias
v6: diameter 7, hole 7, metal2 (power/ground) to metal1 (signal), 2 vias
v7: diameter 6, hole 6, metal4 (pad) to metal3 (RF antennae), 1 vias

## Nets (pads, with @x,y where several pads share a name; then routed paths per layer and width w, separated by ;. In a path a pad name is that pad's centre, name@x,y a point inside that pad or via, vN(x,y) a via of type N, cw(c..) or ccw(c..) an arc to the next point about the centre after c; other vN are vias at no path point)
ALERT: R7.1 U4.3 U7.B1 | length 1270.2
  metal1 (signal) w5: v1(84.66,66.41) 39.08,66.41 cw(c39.08,82.08) 28,71 cw(c35.24,78.24) 25,78.24 25,345.34 cw(c38.66,345.34) 29,355 cw(c38.66,345.34) 38.66,359 ; 110.5,359 38.66,359 ; v2(418.76,613.5) 402,613.5 cw(c402,624.35) 394.32,616.68 332.48,678.52 ccw(c297.52,643.55) 297.52,693 197,693 cw(c197,732) 158,732 ccw(c143,732) 143,747 41,747 ccw(c41,731) 25,731 25,372.66 ccw(c38.66,372.66) 38.66,359
ANTENNA: R8.1 U7.H7 | length 150.9
  metal3 (RF antennae) w5: v7@513.24,519.01 527.99,519.01 cw(c527.99,515) 532,515 532,508 ccw(c538,508) 538,502 560,502
  metal3 (RF antennae) w20: 560,502 594,502 cw(c594,486) 610,486 v4(610,453.68)
  other v7: 514,519
BATTERY_LEVEL: R4.2 R5.1 U7.A4 | length 571.5
  metal1 (signal) w5: v2(466,629.24) 466,708 cw(c483,708) 483,725 796,725 cw(c796,664.64) 838.67,707.33 852.17,693.83 ccw(c859,700.66) 859,691 v1(938,691)
GND: C1.2 C2.2 C3.2 C4.2 C5.2 C7.2 C15.2 C17.2 C18.2 C21.2 C23.2 C27.2 C28.2 C34.2 C35.2 C38.2 C39.2 C40.1 C41.1 C42.2 GND.1 J9.1 L1.1 R1.2 R5.2 U4.2 U4.4 U4.7 U5.B2 U6.1 U7.A2 U7.A5 U7.A6 U7.B2 U7.C1 U7.D6 U7.E8 U7.F1 U7.F6 U7.F7 U7.G4 U7.G5 U7.G6 U7.G7 U7.G8 U7.H5 U7.H6 Y3.2 Y3.4 | length 1765.3
  metal3 (RF antennae) w20: v4(931,1170) v5(950,1151)
  metal2 (power/ground) w20: v3(950,1126) v5(950,1151)
  metal1 (signal) w5: v1(84.66,92) 126,92 126,71 130.59,66.41 v2(167.34,66.41) 296.63,66.41 v1(300,63.04) ; 369.68,550.5 v2(418.76,550.5) ; 387.13,599.87 ccw(c392.25,604.99) 392.25,597.75 418.76,597.75 434.5,613.5 v2(434.5,629.24) ; 466,534.76 481.75,534.76 ; v2@481.75,519.01 481.75,534.76 ; v2(481.75,629.24) 489.2,629.24 ; 489,669 489,673.8 489.2,674 489.2,629.24 ; v2(497.5,519.01) 497.5,534.76 ; v2(528.99,566.25) 513.24,550.5 497.5,550.5 ; v1(672,440) 672,502 ccw(c647,502) 647,527 569.24,527 cw(c569.24,537.24) 562,530 ccw(c550.52,518.52) 550.52,534.76 497.5,534.76 ; v1@954.01,541 v1(954.01,544) v1(954.01,573.04) ; 481.75,534.76 497.5,534.76 ; 489.2,629.24 497.5,629.24 497.5,550.5 ; 497.5,534.76 497.5,550.5
  metal1 (signal) w10: v1(276,674) 309,674 cw(c309,664.34) 315.83,671.17 387.13,599.87 ; v1(287,583) 318,583 cw(c318,558.86) 335.07,575.93 354,557 ccw(c369.68,572.68) 369.68,550.5 ; v1(614,798.37) 614,818 cw(c626,818) 626,830 664,830 cw(c664,829) v1@665,829 ; v1(762,825) 791,825 cw(c791,817) 799,817 v1(799,798.37)
  metal1 (signal) w15: v1(895.01,514) v1(895.01,573.04) ; v3@949.29,1126.71 v3(950,1126) v3(950,1035)
  metal1 (signal) w20: v1(336,264) 336,264.35 v1(375.35,303.7) 416.05,263 v1(416.53,263) v1@417,263 ; v1(367,390) 372,390 v1(406,424) ; v1(754.04,625) v2(754,542.96) v1(787.96,542.96) v1@788,543
  other v1: 446,52 318,728.08 361,728.08 672,789 728,789 973,810 894,814 554,820 664,829 554,860 936,870 904,955 964,955 519,978 520,1037
  other v2: 248,64.04 482,519 107.96,679 107.96,722
  other v4: 649,217 650,266
LED_RED: D1.A U7.D1 | length 908.7
  metal2 (power/ground) w15: v3(252,643) 252,228 ccw(c288.65,228) 288.65,191.35 v3(456,191.35)
  metal1 (signal) w5: 381.05,586.95 ccw(c393,598.9) 393,582 v2(418.76,582)
  metal1 (signal) w10: v3(252,643) 307,643 cw(c307,599.54) 337.73,630.27 381.05,586.95
  metal1 (signal) w15: v1@456,112 v3(456,191.35)
  other v1: 458,112
NetC6_1: C6.1 R8.2 | length 52
  metal3 (RF antennae) w20: v4(610,359) v4(610,411)
NetC6_2: C6.2 C7.1 L1.2 L3.1 | length 154.7
  metal3 (RF antennae) w20: v4(609.65,165.36) 609.65,266 v4(609.65,320.08)
  other v4: 609,217 609,266
NetC34_1: C34.1 C42.1 L2.1 R6.2 U5.A2 | length 320.9
  metal1 (signal) w5: v1@483,758 v1(483.5,758.5) v1@484,759
  metal1 (signal) w10: v1(259,765) 266,758 v1(318,758)
  metal1 (signal) w20: v1(318,758) v1@319,758 ; v1(319,850.63) v1@319,758 ; v1@483,758 v1@319,758
NetD1_K: D1.K R1.1 | length 60.8
  metal1 (signal) w15: v1(413.5,52) 413.5,110.16 v1(415.35,112)
NetE2_1: E2.1 L3.2 | length 214.2
  metal3 (RF antennae) w20: v4(609.65,124.81) v4(823.81,124.81)
SCL: R3.2 SCL.1 U4.1 U6.3 U7.H1 | length 1586.8
  metal3 (RF antennae) w5: v5@305,1157 v5(307,1157)
  metal3 (RF antennae) w20: v4(289,1173) v5@305,1157
  metal2 (power/ground) w5: v3@306.5,1129 307,1129.5 v3(307,1130)
  metal2 (power/ground) w20: 76,300 76,309.74 75.5,310.24 cw(c114.76,310.24) 87,338 109.25,360.25 111.71,362.71 ccw(c41,433.42) 141,433.42 141,581.4 141,694.79 cw(c192.21,694.79) 155.99,730.99 155.99,810.99 307,962 v3(307,1035) ; v3(307,1130) v5(307,1157)
  metal1 (signal) w5: 331.27,519.01 v2(418.76,519.01)
  metal1 (signal) w10: v2(141.5,581.4) 141.5,552.87 ccw(c156.87,552.87) 146,542 ccw(c153.24,549.24) 153.24,539 283,539 cw(c283,514.52) 300.31,531.83 ccw(c331.27,562.78) 331.27,519.01
  metal1 (signal) w15: v3@306.29,1130.71 v3(307,1130) v3(307,1035)
  metal1 (signal) w20: v1(84.66,117.59) 84.66,197.75 ccw(c68.75,197.75) 80,209 cw(c89.66,218.66) 76,218.66 76,300 v1(110.25,300) ; v2(141.5,581.4) v3(141.5,658)
  other v2: 141.5,506.6
  other v3: 141.5,506.6
SDA: R2.2 SDA.1 U4.6 U6.2 U7.J1 | length 1530.9
  metal3 (RF antennae) w20: v4(420,1169) v5(436,1153)
  metal2 (power/ground) w20: v3(137,180) 137,225.72 cw(c205.28,225.72) 157,274 ccw(c2.49,428.51) 221,428.51 221,683 cw(c269.28,683) 235.14,717.14 408.42,890.42 ccw(c341.85,957) 436,957 v3(436,1035) ; v3(436,1129) v5(436,1153)
  metal1 (signal) w5: 221,518 cw(c223.41,515.59) 223.41,519 ; 326.34,503.26 v2(418.76,503.26)
  metal1 (signal) w10: 223.41,519 288.34,519 cw(c288.34,505.34) 298,515 ccw(c326.34,543.34) 326.34,503.26
  metal1 (signal) w15: 141.5,506.6 195.6,506.6 207,518 221,518 ; v3@435.29,1129.71 v3(436,1129) v3(436,1035)
  metal1 (signal) w20: v1@110.25,239 v1(110,238.75) 110,218 ccw(c136.56,218) 117.78,199.22 v3(137,180) 155.5,161.5 cw(c126.92,132.92) 167.34,132.92 v1(167.34,117.59)
  other v2: 141.75,239
SWD_CLK: SWD_CLK.1 U7.F2 | length 836.6
  metal3 (RF antennae) w20: v4(548,1167) v5(565,1150)
  metal2 (power/ground) w5: 310.5,681.08 354.35,681.08 395,721.73 395,807 551.86,963.86
  metal2 (power/ground) w15: v3@310.5,617 310.5,681.08 ; 551.86,963.86 ccw(c517.72,998) 566,998 566,1032.59 ccw(c562.59,1032.59) v3(565,1035)
  metal2 (power/ground) w20: v3(565,1128) v5(565,1150)
  metal1 (signal) w5: 392,568 416.3,568 433.8,550.5 v2@434.5,550.5
  metal1 (signal) w10: v3(310,617) 312,617 cw(c312,578.37) 339.31,605.69 366.39,578.61 ccw(c392,604.21) 392,568
  metal1 (signal) w15: v3@564.29,1128.71 v3(565,1128) v3(565,1035)
  other v2: 434,550
SWD_DATA: SWD_DATA.1 U7.G1 | length 923.3
  metal3 (RF antennae) w20: v4@678.36,1171 v5(695,1154.36)
  metal2 (power/ground) w5: 336.5,646 336.5,650.5 404,718 404,785 528.71,909.71
  metal2 (power/ground) w15: v3(336,538) 336.5,538.5 336.5,646 ; 528.71,909.71 cw(c599.42,839) 599.42,939 634.37,939 ccw(c634.37,993.63) 673,955 682.98,964.98 ccw(c653.96,994) 695,994 v3(695,1035)
  metal2 (power/ground) w20: v3(695,1128) v5(695,1154.36)
  metal1 (signal) w5: v3(336,538) 339.24,534.76 341.24,534.76 ; 391,534.76 v2(418.76,534.76)
  metal1 (signal) w10: 341.24,534.76 391,534.76
  metal1 (signal) w15: v3@694.29,1128.71 v3(695,1128) v3(695,1035)
  other v4: 680,1172
V_BATT: C4.1 C5.1 C27.1 C28.1 J8.1 R4.1 R6.1 U5.A1 U5.B1 V_BATT.1 | length 1700.1
  metal3 (RF antennae) w5: v5@47,1155 v5(50,1155)
  metal3 (RF antennae) w20: v4(29,1173) v5@47,1155
  metal2 (power/ground) w20: v3(50,1130) v5(50,1155)
  metal1 (signal) w5: v1(239.32,783.84) 239.32,829.68 ; 249.82,840.18 253,843.37 ; v1(259,783.84) 259,831 ; 480.31,929 523,886.32 v1(523,862) 523,795 534,784 563.93,784 ccw(c563.93,801.07) 576,789 577.39,790.39 ccw(c551.79,816) 588,816 588,828.51 cw(c608.49,828.51) 594,843 cw(c630.21,806.79) 630.21,858 829,858 cw(c829,843) 844,843 844,826 ccw(c897.11,826) 859.55,788.45 868,780 cw(c846.27,758.27) 877,758.27 v1(877,722.5)
  metal1 (signal) w10: 50,1050.9 ccw(c73.9,1050.9) 57,1034 cw(c25.62,1002.62) 70,1002.62 92,980.62 v1(92,929)
  metal1 (signal) w15: 50,1050.9 v3(50,1130)
  metal1 (signal) w20: v1@90,929 v1(92,929) 480.31,929 v1(480.31,1037) ; 254,891 v1@319,891
  metal1 (signal) w25: 249.82,815 249.82,840.18 ; 250.5,841.5 250.5,924
  other v1: 522,819 319,890 479,978
VCC: C2.1 C3.1 C17.1 C18.1 C21.1 C23.1 C40.2 C41.2 L2.2 R2.1 R3.1 R7.2 R11.1 U4.5 U6.4 U7.A8 U7.D2 U7.F8 U7.G2 U7.J3 U7.J6 VCC.1 | length 3858.5
  metal3 (RF antennae) w20: v4(156,1176) v5(177,1155)
  metal2 (power/ground) w5: v3@450,452.5 v3(450.25,452.25) ; v3@569.59,695 cw(c569.59,691.59) v3@572,694
  metal2 (power/ground) w15: v3(440,695) v3@569.59,695
  metal2 (power/ground) w20: v3(177,1035) 177,931.17 cw(c77,931.17) 147.71,860.46 91,803.75 ccw(c119.97,774.78) 79,774.78 v2(79,581) v3(79,426) 79,420.11 cw(c3.89,420.11) 57,367 ccw(c85.97,338.03) 45,338.03 45,228 ccw(c122,228) 122,151 481,151 ccw(c481,191) 521,191 v1(521,461) 521,530 cw(c542,530) 527.84,545.5 ; v3(177,1129) v5(177,1155) ; v3@450,452.5 450.25,452.76 v2(450.25,503) ; 450.25,509 cw(c491.76,509) 491.76,550.5 ; 491.76,545.5 527.84,545.5 ; v3(572,759) v3(572,695) 572,694 ccw(c572,692.8) 570.8,692.8 570.8,545.5 527.84,545.5
  metal1 (signal) w5: v2(78.04,679) v2@78.5,678.54 ; v1(167.34,92) 195.68,92 ccw(c195.68,95.28) 198,92.96 ; v2(434.5,534.76) 450.25,534.76 450.25,582 ; v2(434.5,582) 450.25,582 ; v3(440,695) 440,667.9 ccw(c463.9,667.9) 447,651 cw(c439.15,643.15) 450.25,643.15 450.25,582 ; v3(450.25,452.25) v2(450.25,503) ; v2(497.5,503.26) 497.5,484.5 v1(521,461) ; v2(528.99,629.24) 557.24,629.24 ccw(c557.24,644) 572,644 v3(572,695)
  metal1 (signal) w15: v3@176.29,1129.71 v3(177,1129) v3(177,1035)
  metal1 (signal) w20: v1@78.04,722 78.5,721.54 v1(78.5,721) 78.5,678.54 v3(78.5,582) v3@78.5,581.4 ; v3(79,426) 118.1,426 cw(c118.1,402.1) 135,419 cw(c118.1,402.1) 142,402.1 v2(142,359) 142,239 ; 141.75,239 142,239 ; 198,92.96 v1(300,92.96) ; v2(248,93.96) 248,159 ccw(c161.09,159) 222.54,220.46 ccw(c177.77,175.69) 177.77,239 142,239 ; v1(515.5,759) v3(572,759) v1(614,759) v1(672,759) v1(731,759) v1(799,759)
  other v2: 141.75,300 450,519
  other v3: 300,92.96
VCCD: C1.1 U7.A7 | length 521.8
  metal1 (signal) w5: v2(513.24,629.24) 513.24,697.24 cw(c529,697.24) 529,713 563.84,713 564.34,713.5 579.66,713.5 580.16,713 804.69,713 cw(c804.69,685.69) 823.99,705.01 895.01,633.99 v1(895.01,602.96)
VREF: C15.1 U7.A1 | length 831.5
  metal2 (power/ground) w5: v6(853,763) 959,763 967,755 967,667 v6@954,633
  metal1 (signal) w5: v2(418.76,629.24) 418.76,723.76 cw(c432,723.76) 432,737 847,737 ccw(c847,743) 853,743 v6(853,763) ; 954.01,602.96 v6(954.01,633)
XRES: C35.1 R11.2 U7.C7 XRES.1 | length 1036.3
  metal3 (RF antennae) w20: v4(803,1171) v5(823,1151)
  metal2 (power/ground) w5: v3@822,1034 v3(823,1035)
  metal2 (power/ground) w10: v3(823,560) v2(823,595) v3@823,1033
  metal2 (power/ground) w15: v3@822,1034 v3@823,1033
  metal2 (power/ground) w20: v3(823,1126) v5(823,1151)
  metal1 (signal) w5: v2(513.24,597.75) 527.74,583.25 ccw(c557.32,612.83) 557.32,571 569.69,571 cw(c569.69,543.69) 588.99,563.01 603.51,548.49 ccw(c624,568.97) 624,540 649.27,540 cw(c649.27,509.27) 671,531 683.34,518.66 ccw(c697,532.31) 697,513 v2(754,513)
  metal1 (signal) w15: v2@754,513.04 804.2,513.04 ccw(c804.2,536.8) 821,520 ccw(c816.17,524.83) 823,524.83 v3(823,560) v2(823,595) v2@823,596.25 ; v3@822.29,1126.71 v3(823,1126) v3(823,1035)
XTAL_HF_N: J14.1 U7.H3 Y3.3 | length 268.6
  metal1 (signal) w5: 412,460 421.17,460 ccw(c421.17,466.83) 426,462 ccw(c411.51,476.49) 432,476.49 432,493.14 cw(c452.08,493.14) 437.88,507.34 449.55,519.01 450.25,519.01
  metal1 (signal) w30: 314.14,364.91 cw(c336.26,387) 305,387 305,388.86 cw(c339.14,388.86) 315,413 332,430 355.48,453.48 cw(c371.22,437.74) 371.22,460 412,460 ; 314.16,364.89 v1(328.03,351.03)
XTAL_HF_P: J13.1 U7.H4 Y3.1 | length 207.3
  metal1 (signal) w5: v1(414.33,342.67) cw(c418.31,342.67) v1@415.49,345.49 ; v2(466,519.01) 466,493.49 ccw(c486.49,493.49) 472,479 cw(c445.44,452.44) 483,452.44 483,450
  metal1 (signal) w30: v1@415.49,345.49 470.27,400.27 ccw(c439.54,431) 483,431 483,450
XTAL_LF_N: C39.1 J12.1 U7.B7 Y4.2 | length 255.6
  metal1 (signal) w5: v2(513.24,613.49) 529.49,597.25 575.49,597.25 ; v1(699,551) 699,585.85 699,586
  metal1 (signal) w10: 575.49,597.25 cw(c575.49,572.49) 593,590
  metal1 (signal) w20: 593,590 ccw(c603.01,600.01) 603.01,585.85 v2(649.87,585.85) 699,585.85 ; 699,586 v1(724.04,586)
XTAL_LF_P: C38.1 J11.1 U7.B8 Y4.1 | length 228.2
  metal1 (signal) w5: v2(528.99,613.5) 567.47,613.5 ; 699,629.25 v1(699,658) ; v1(722.23,629.25) ccw(c722.23,631.81) v1@724.04,630
  metal1 (signal) w10: 567.47,613.5 ccw(c567.47,642.53) 588,622
  metal1 (signal) w20: 588,622 cw(c605.51,604.49) 605.51,629.25 v2(649.87,629.25) 699,629.25 v1(722.23,629.25)
pads on no net: E2.2 U7.A3 U7.B3 U7.B4 U7.B5 U7.B6 U7.C2 U7.C3 U7.C4 U7.C5 U7.C6 U7.C8 U7.D3 U7.D4 U7.D5 U7.D7 U7.D8 U7.E1 U7.E2 U7.E3 U7.E4 U7.E5 U7.E6 U7.E7 U7.F3 U7.F4 U7.F5 U7.G3 U7.H2 U7.J2 U7.J7

## Polygon pours and split planes (outlines as drawn)
GND on metal3 (RF antennae) "RF_GND_TOP" (solid, pour order 1012): 500,0 500,500 1000,500 1000,0
GND on metal1 (signal) "GND_TOP" (solid, pour order 1004): 0,0 0,1200 1000,1200 1000,500 500,500 500,0
GND on metal2 (power/ground) "GND_BOTTOM" (solid, pour order 1008): 0,0 0,1200 1000,1200 1000,500 500,500 500,0

## Keep-outs
Keep-Out Layer:
  the board outline again, w10

## Other copper
metal3 (RF antennae):
  pour cut-out: 1000,0 775,0 775,225 1000,225
metal1 (signal):
  pour cut-out: 1000,0 775,0 775,225 1000,225
  pour cut-out: 515,500 250,500 250,250 515,250
  pour cut-out: 572,695 740,695 740,540 570.8,540 570.8,550.5

## Silkscreen, mask and mechanical layers (free items; w line width, h text height)
Top Overlay:
  lines w10: 15,1060 987,1060
Mechanical 1:
  lines w3.94: 0,1000 0,-0.06 1000,-0.06 1000,1000
  lines w4: 0,1000 1000,1000